# Altium PCB pd.PcbDoc
Units mil, origin at the board's own origin, x right, y up, seen from the top; angles counter-clockwise.
Board outline 3098.43 x 2220.47 mil, 4 copper layers (Top Layer, GND, VCC, Bottom Layer), stack 30.634 mil thick; 93 components, 43 nets, 276 pads, 52 vias.
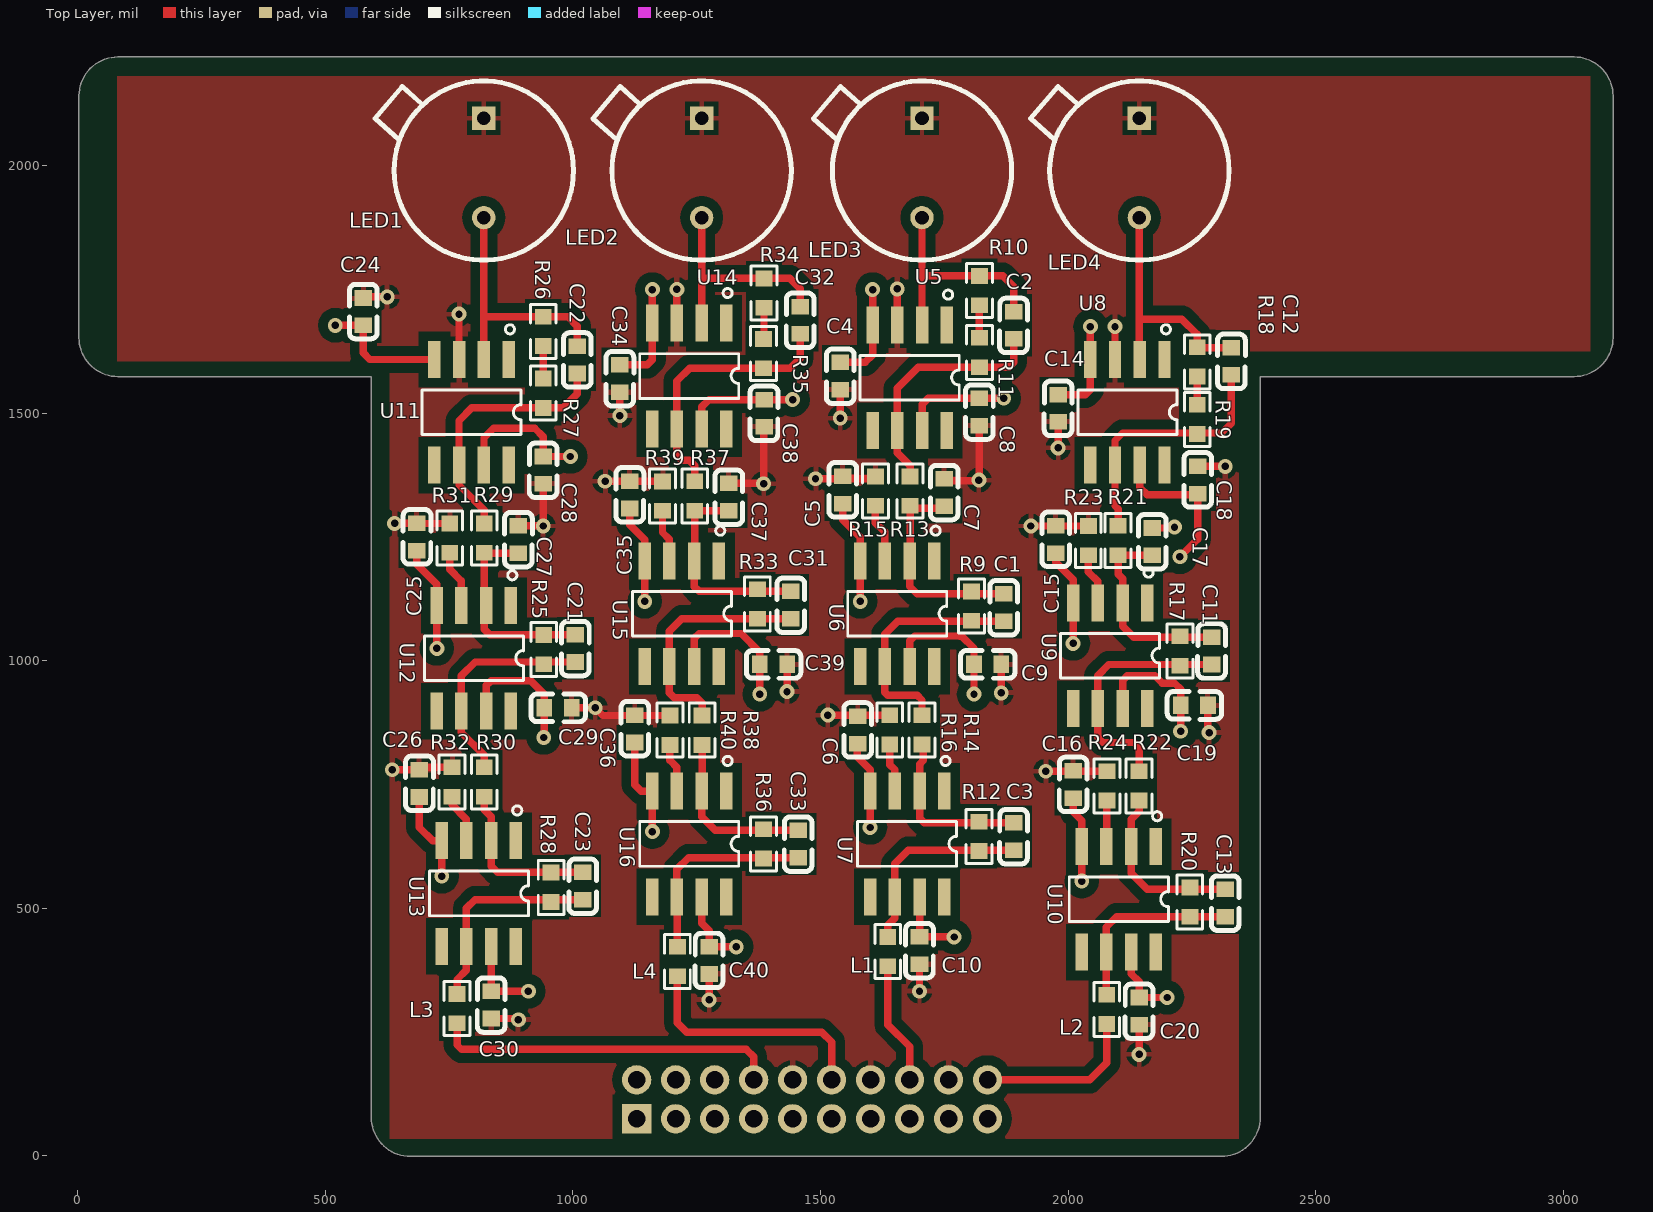
[diagram p0: Top Layer view]
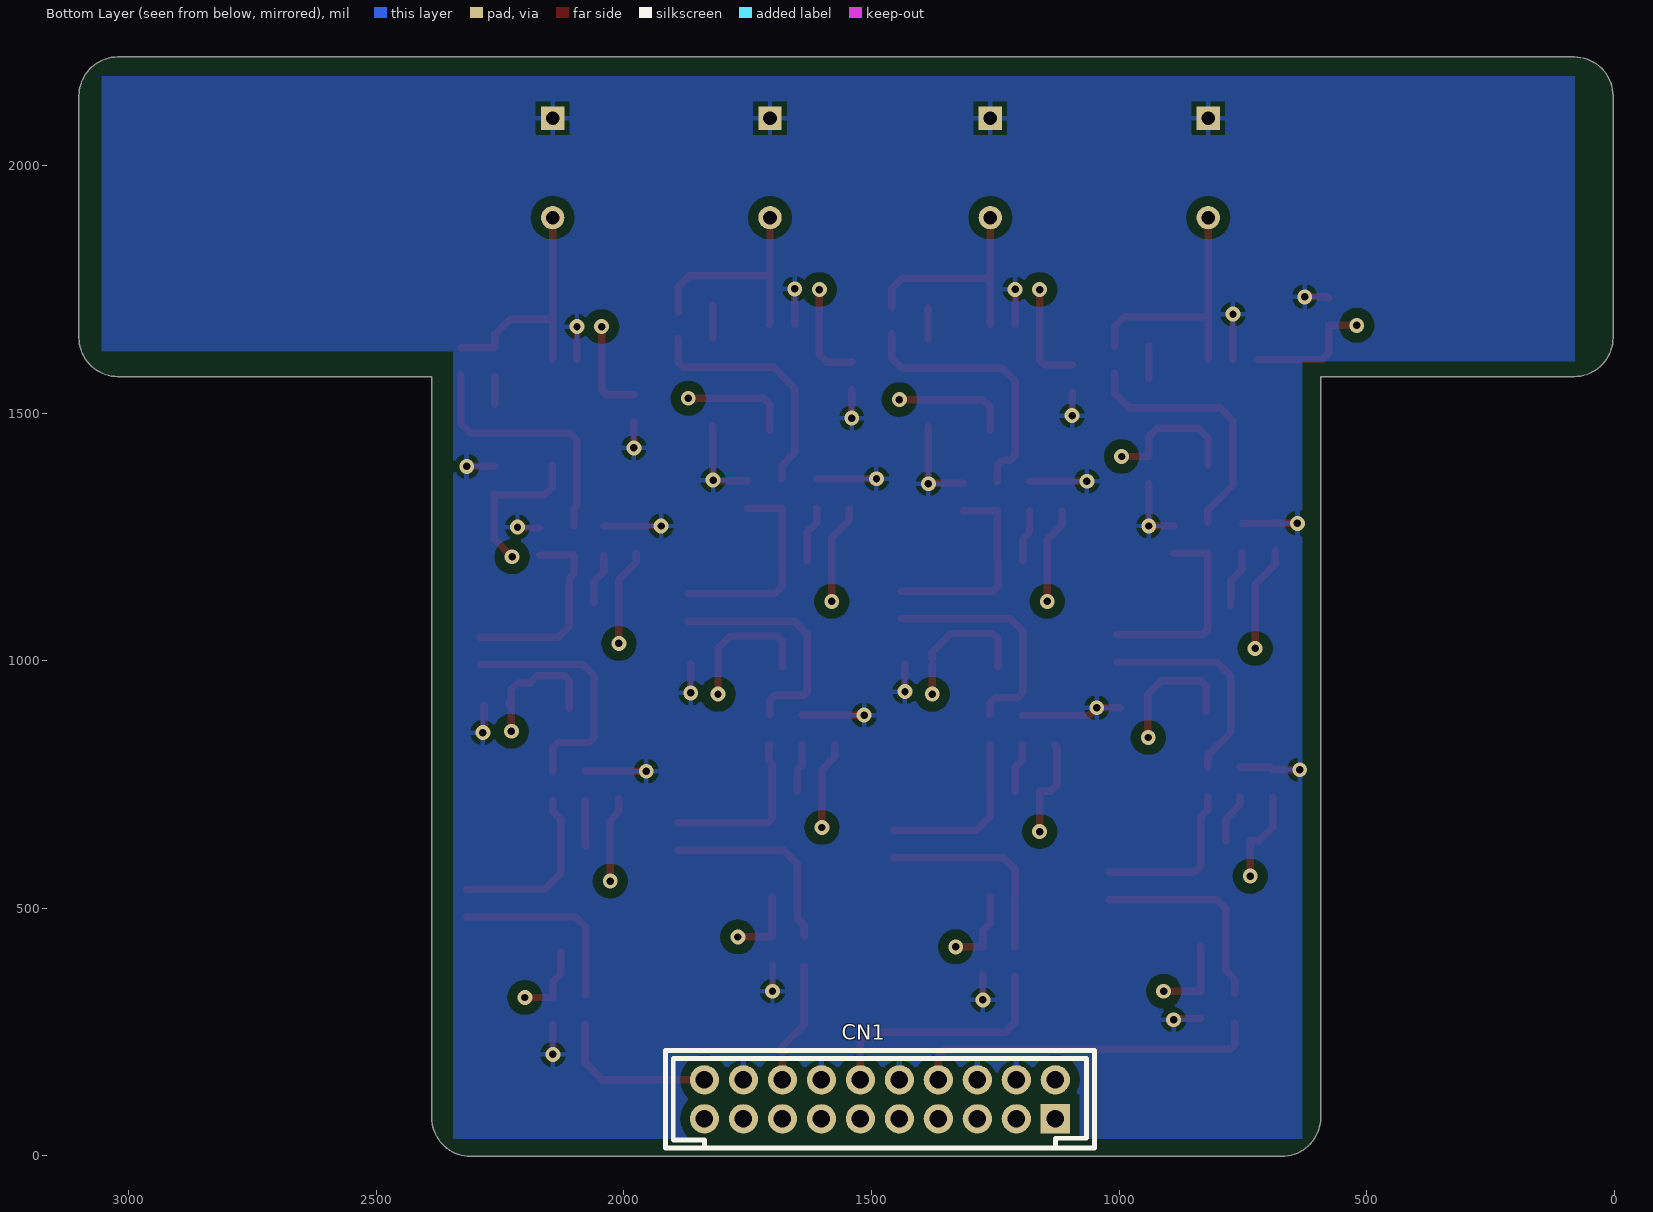
[diagram p1: Bottom Layer view, seen from below]
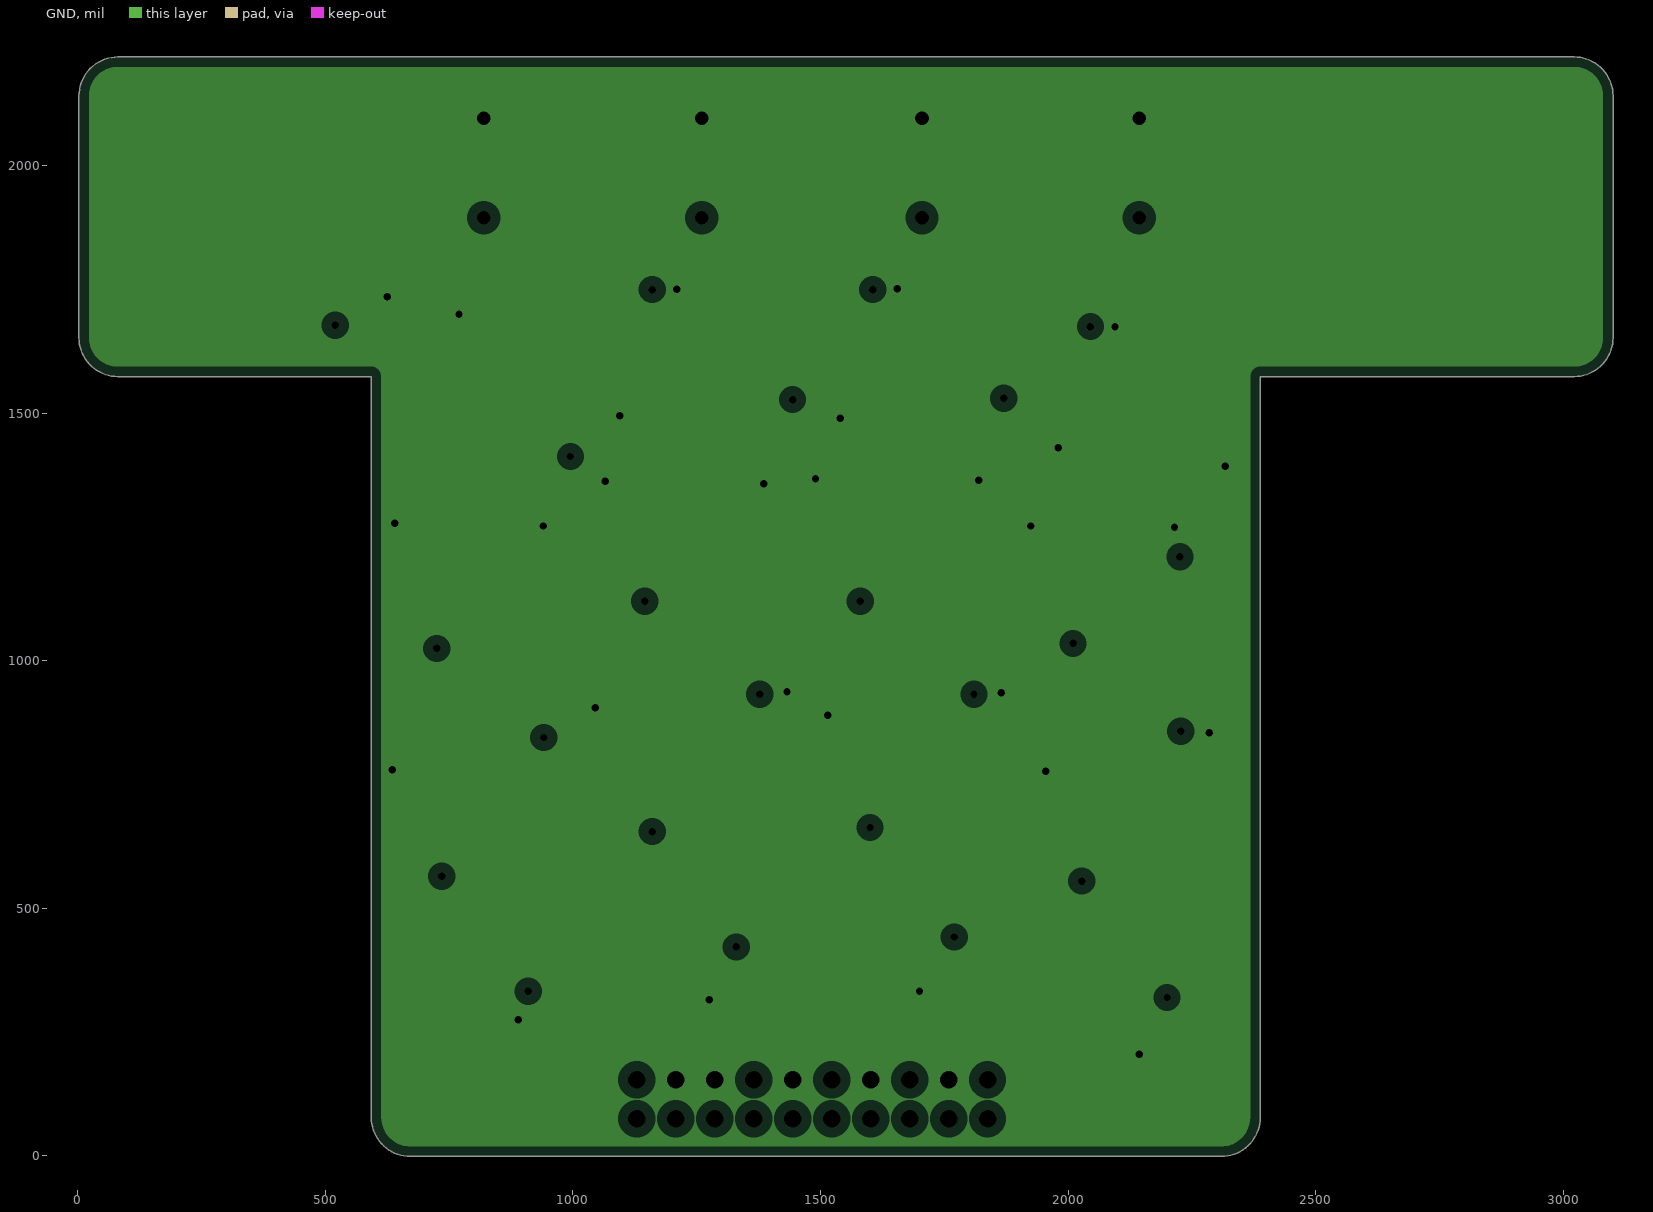
[diagram p2: GND, clearances drawn from the general rule]
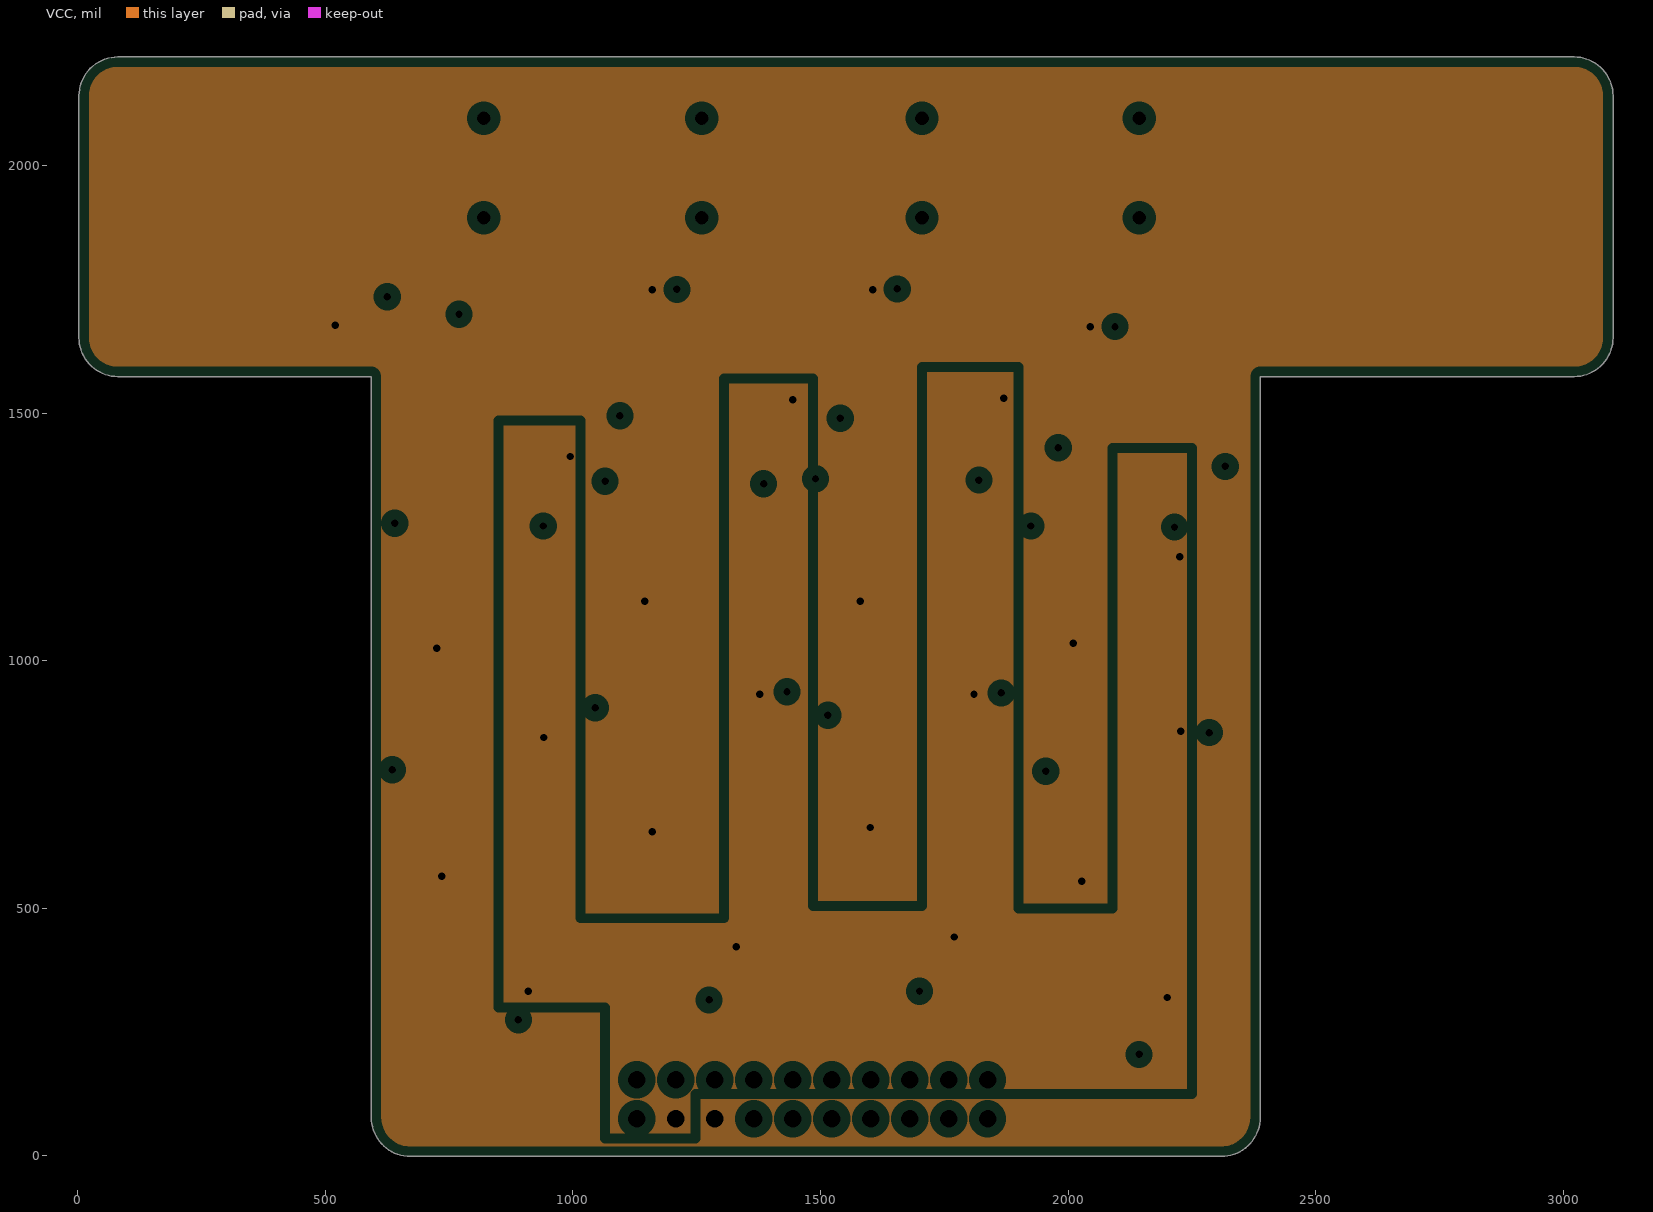
[diagram p3: VCC, clearances drawn from the general rule]

## Layer stack, top to bottom
Top Solder: solder mask 0.4, Solder Resist, Dk 3.5
Top Layer: signal copper 1.4
Dielectric 1: core 10, FR-4, Dk 4.2
GND: plane copper 1.417, net AGND
Dielectric 3: prepreg 5, Dk 4.2
VCC: plane copper 1.417, net (Multiple Nets)
Dielectric 2: core 10, Dk 4.2
Bottom Layer: signal copper 1.4
Bottom Solder: solder mask 0.4, Solder Resist, Dk 3.5

## Board outline
81.06,1573.87 592.87,1573.87 592.87,77.81 ccw(c671.61,77.81) 671.61,-0.93 2309.41,-0.93 ccw(c2309.41,77.81) 2388.15,77.81 2388.15,1573.87 3022.01,1573.87 ccw(c3022.01,1652.61) 3100.75,1652.61 3100.75,2140.8 ccw(c3022.01,2140.8) 3022.01,2219.54 81.06,2219.54 ccw(c81.06,2140.8) 2.32,2140.8 2.32,1652.61 ccw(c81.06,1652.61)

## Design rules (kind name [scope] priority, off if disabled: settings)
Clearance [All] p1: gap=20 ignorepadtopadclearanceinfootprint=FALSE except(6: Arc-Arc Arc-Track Arc-SMDPad Arc-THPad Arc-Via Arc-Text Arc-Hole Track-Track Track-SMDPad Track-THPad Track-Via Track-Text Track-Hole SMDPad-SMDPad SMDPad-THPad SMDPad-Via SMDPad-Text SMDPad-Hole THPad-THPad THPad-Via THPad-Text THPad-Hole Via-Via Via-Text Via-Hole Text-Text Text-Hole)
ComponentClearance [All] p1: gap=0 collisioncheckmode=3 verticalgap=0 showdistances=FALSE
PlaneClearance [All] p1: clearance=20
PlaneConnect [All] p1: planeconnectstyle=Relief reliefexpansion=20 reliefentries=4 reliefconductorwidth=10 reliefairgap=10
PolygonConnect [All] p1: connectstyle=Relief reliefconductorwidth=10 reliefentries=4 polygonreliefangle="90 Angle" airgapwidth=10
RoutingVias [All] p1: holewidth=15 width=30 viastyle="Through Hole" minholewidth=1 minwidth=1 maxholewidth=28 maxwidth=50
SilkToSilkClearance [All] p1: silktosilkclearance=0
SilkToSolderMaskClearance [IsPad] p1: minsilkscreentomaskgap=0 clearancetoexposedcopper=TRUE
SolderMaskExpansion [All] p1: expansion=4
Width [All] p1: maxlimit=100 minlimit=1 preferedwidth=15
25 further rules are at their usual default settings.

## Classes and differential pairs
component class pd: C21 C22 C23 C24 C25 C26 C27 C28 C29 C30 C31 C32 C33 C34 C35 C36 C37 C38 C39 C40 L3 L4 LED1 LED2 R25 R26 R27 R28 R29 R30 R31 R32 R33 R34 R35 R36 R37 R38 R39 R40 U11 U12 U13 U14 U15 U16
component class PD2: C1 C2 C3 C4 C5 C6 C7 C8 C9 C10 C11 C12 C13 C14 C15 C16 C17 C18 C19 C20 L1 L2 LED3 LED4 R9 R10 R11 R12 R13 R14 R15 R16 R17 R18 R19 R20 R21 R22 R23 R24 U5 U6 U7 U8 U9 U10
component class cnt: 1 2 3 4 CN1

## Components (designator, comment, footprint, x,y, rotation, side; value= is the part's Value field where it differs from the comment)
C1 "1000pF(NC)" 0603_C 1870,1102.44 r90 top
C2 "100P" 0603_C 1890,1672.56 r90 top
C3 "1000pF(NC)" 0603_C 1890,640 r90 top
C4 "0.1uF" 0603_C 1540,1570 r90 top
C5 "0.1uF" 0603_C 1545,1350 r270 top
C6 "0.1uF" 0603_C 1575,865 r270 top
C7 "0.01uF(NC)" 0603_C 1750,1335 r90 top
C8 "0.1uF" 0603_C 1820.99,1497.56 r90 top
C9 "0.1uF" 0603_C 1842.56,992.88 r180 top
C10 "0.1uF" 0603_C 1700,410 r90 top
C11 "1000pF(NC)" 0603_C 2290,1015 r90 top
C12 "100P" 0603_C 2330,1600 r90 top
C13 "1000pF(NC)" 0603_C 2317.44,505.86 r90 top
C14 "0.1uF" 0603_C 1980,1505 r90 top
C15 "0.1uF" 0603_C 1975,1250 r270 top
C16 "0.1uF" 0603_C 2010.2,755 r270 top
C17 "0.01uF(NC)" 0603_C 2170,1235.61 r90 top
C18 "0.1uF" 0603_C 2261.82,1370 r270 top
C19 "0.1uF" 0603_C 2260,910 r180 top
C20 "0.1uF" 0603_C 2143.44,287.44 r90 top
C21 "1000pF(NC)" 0603_C 1005,1020 r90 top
C22 "100P" 0603_C 1009.01,1602.81 r90 top
C23 "1000pF(NC)" 0603_C 1020,540 r90 top
C24 "0.1uF" 0603_C 576.62,1710 r270 top
C25 "0.1uF" 0603_C 685,1255 r270 top
C26 "0.1uF" 0603_C 690,757.44 r270 top
C27 "0.01uF(NC)" 0603_C 890,1240 r90 top
C28 "0.1uF" 0603_C 940,1380 r90 top
C29 "0.1uF" 0603_C 975,905 r180 top
C30 "0.1uF" 0603_C 835,300 r90 top
C31 "1000pF(NC)" 0603_C 1440,1107.44 r90 top
C32 "100P" 0603_C 1459.01,1682.81 r90 top
C33 "1000pF(NC)" 0603_C 1455,625 r90 top
C34 "0.1uF" 0603_C 1095,1565 r90 top
C35 "0.1uF" 0603_C 1115,1340 r270 top
C36 "0.1uF" 0603_C 1125,867.56 r270 top
C37 "0.01uF(NC)" 0603_C 1315,1325.61 r90 top
C38 "0.1uF" 0603_C 1385.99,1495 r90 top
C39 "0.1uF" 0603_C 1410,992.88 r180 top
C40 "0.1uF" 0603_C 1275,390 r90 top
CN1 "HC-PHD-2*10A" HC-PHD-2*10A 1481.18,115.95 r180 bottom
L1 "100R" R0603 1635,415 r90 top
L2 "100R" R0603 2077.25,298.31 r90 top
L3 "100R" R0603 765,300 r90 top
L4 "100R" R0603 1210,395 r90 top
LED1 "LTST-C191TGKT" PD 820,1895 r90 top locked
LED2 "LTST-C191TGKT" PD 1260,1895 r90 top locked
LED3 "LTST-C191TGKT" PD 1705,1895 r90 top locked
LED4 "LTST-C191TGKT" PD 2144.05,1895 r90 top locked
R9 "6.8K" 0603_R 1789.01,1102.81 r90 top
R10 "500M" 0603_R 1805,1740 r90 top
R11 "0" 0603_R 1805,1615 r90 top
R12 "6.8K" 0603_R 1804.01,637.81 r90 top
R13 "1K" 0603_R 1665,1335 r90 top
R14 "1K" 0603_R 1689.01,852.81 r90 top
R15 "1K" 0603_R 1595,1335 r90 top
R16 "1K" 0603_R 1624.01,852.81 r90 top
R17 "6.8K" 0603_R 2210,1012.31 r90 top
R18 "500M" 0603_R 2245,1596.19 r90 top
R19 "0" 0603_R 2245,1480 r90 top
R20 "6.8K" 0603_R 2230,505 r90 top
R21 "1K" 0603_R 2085,1235.27 r90 top
R22 "1K" 0603_R 2127.44,739.74 r90 top
R23 "1K" 0603_R 2025,1235 r90 top
R24 "1K" 0603_R 2062.44,739.74 r90 top
R25 "6.8K" 0603_R 925,1015 r90 top
R26 "500M" 0603_R 924.01,1657.81 r90 top
R27 "0" 0603_R 924.01,1532.81 r90 top
R28 "6.8K" 0603_R 940,535 r90 top
R29 "1K" 0603_R 805,1240 r90 top
R30 "1K" 0603_R 805,747.72 r90 top
R31 "1K" 0603_R 735.2,1240 r90 top
R32 "1K" 0603_R 740,747.72 r90 top
R33 "6.8K" 0603_R 1356.53,1107.11 r90 top
R34 "500M" 0603_R 1370,1735 r90 top
R35 "0" 0603_R 1369.01,1612.81 r90 top
R36 "6.8K" 0603_R 1369.01,622.81 r90 top
R37 "1K" 0603_R 1230,1325.27 r90 top
R38 "1K" 0603_R 1245,852.22 r90 top
R39 "1K" 0603_R 1165,1325 r90 top
R40 "1K" 0603_R 1180,852.22 r90 top
U5 "LTC6240" TSOT-23-5 1690.2,1576.69 r270 top
U6 "OP07/SO" TSOT-23-5 1665,1100 r270 top
U7 "OP07/SO" TSOT-23-5 1685,635 r270 top
U8 "LTC6240" TSOT-23-5 2130,1506.69 r270 top
U9 "OP07/SO" TSOT-23-5 2095,1015.2 r270 top
U10 "OP07/SO" TSOT-23-5 2112.44,523.31 r270 top
U11 "LTC6240" TSOT-23-5 805.2,1506.69 r270 top
U12 "OP07/SO" TSOT-23-5 810,1010 r270 top
U13 "OP07/SO" TSOT-23-5 820,535 r270 top
U14 "LTC6240" TSOT-23-5 1245,1580 r270 top
U15 "OP07/SO" TSOT-23-5 1230,1100 r270 top
U16 "OP07/SO" TSOT-23-5 1245,635 r270 top

## Footprints (in the part's own frame and the unit in brackets; to place one, negate y for a bottom-side part, rotate by r counter-clockwise, add the part's x,y. Pads: shape width x height; smd on the part's side, far side on the other; paste and mask are expansions set on the pad)
0603_C [mm]
  rect 0.8x0.9 smd: 1(-0.573,0) 2(0.827,0)
  silkscreen extent -1.28,-0.71 1.52,0.72
0603_R [mil]
  rect 31.75x34.02 smd: 1(-22.12,-15.99) 2(37.19,-15.99)
  silkscreen extent -47,-42 62,10
HC-PHD-2*10A [mm]
  rect 1.5x1.5 hole 0.9: 1(8.951,-1.04)
  round 1.5 hole 0.9: 2(8.951,0.96) 3(6.951,-1.04) 4(6.951,0.96) 5(4.951,-1.04) 6(4.951,0.96) 7(2.951,-1.04) 8(2.951,0.96) 9(0.951,-1.04) 10(0.951,0.96) 11(-1.049,-1.04) 12(-1.049,0.96) 13(-3.049,-1.04) 14(-3.049,0.96) 15(-5.049,-1.04) 16(-5.049,0.96) 17(-7.049,-1.04) 18(-7.049,0.96) 19(-9.049,-1.04) 20(-9.049,0.96)
  silkscreen extent -11.05,-2.54 10.95,2.46
PD [mm]
  rect 1.2x1.2 hole 0.7: 1(5.1,0)
  round 1.2 hole 0.7: 2(0,0)
  silkscreen extent -2.18,-4.6 7.01,5.58
R0603 [mil]
  rect 31.75x34.02 smd: 1(-32.12,-0.99) 2(27.19,-0.99)
  silkscreen extent -57,-27 52,25
TSOT-23-5 [mil]
  rect 74.8x25.2 smd: 1(-101.69,64.8) 2(-101.69,15.2) 3(-101.69,-35.2) 4(-101.69,-84.8) 5(111.69,-84.8) 6(111.69,-35.2) 7(111.69,15.2) 8(111.69,64.8)
  silkscreen extent -172,-110 50,90

## Part data
C1 C2 C3 C4 C5 C6 C7 C8 C9 C10 C11 C12 C13 C14 C15 C16 C17 C18 C19 C20 C21 C22 C23 C24 C25 C26 C27 C28 C29 C30 C31 C32 C33 C34 C35 C36 C37 C38 C39 C40: library part "CAP NP 0805"
CN1: BOM_Manufacturer=HCTL(华灿天, BOM_Manufacturer Part=HC-PHD-2*10A, BOM_Supplier=LCSC, BOM_Supplier Part=C2845621, Contributor=LCSC, spicePre=C, spiceSymbolName=HC-PHD-2*10A
L1 L2 L3 L4 R9 R10 R11 R12 R13 R14 R15 R16 R17 R18 R19 R20 R21 R22 R23 R24 R25 R26 R27 R28 R29 R30 R31 R32 R33 R34 R35 R36 R37 R38 R39 R40: library part "RES 0805"
LED1 LED2 LED3 LED4: BOM_Manufacturer=LITEON, BOM_Manufacturer Part=LTST-C191TGKT, BOM_Supplier=LCSC, BOM_Supplier Part=C125101, Contributor=LCSC, spicePre=L, spiceSymbolName=LTST-C191TGKT
U5 U6 U7 U8 U9 U10 U11 U12 U13 U14 U15 U16: library part OP07/SO_1

## Via types
v1: diameter 30, hole 15, Top Layer to Bottom Layer, 52 vias

## Nets (pads, with @x,y where several pads share a name; then routed paths per layer and width w, separated by ;. In a path a pad name is that pad's centre, name@x,y a point inside that pad or via, vN(x,y) a via of type N, cw(c..) or ccw(c..) an arc to the next point about the centre after c; other vN are vias at no path point)
A+5V: C8.2 C9.2 C10.2 C18.2 C19.2 C20.2 C28.2 C29.2 C30.2 C38.2 C39.2 C40.2 CN1.3 U5.7 U6.7 U7.7 U8.7 U9.7 U10.7 U11.7 U12.7 U13.7 U14.7 U15.7 U16.7 | length 2814.7
  Top Layer w15: U11.7 820.4,1450.4 840,1470 922.52,1470 940,1452.52 C28.2 v1(995,1412.56) ; U12.7 825.2,950.2 835,960 915,960 942.44,932.56 C29.2 942.44,846.45 v1(940.99,845) ; C30.2 C30.2@840,332.56 ; U13.7 835.2,337.35 C30.2@840,332.56 ; v1(910,332.56) C30.2@840,332.56 ; U15.7 1245.2,1045.2 1255,1055 1340,1055 1377.44,1017.56 C39.2@1377.44,1005 ; U16.7 1260.2,469.8 1275,455 C40.2 1329.63,422.56 v1(1330,422.19) ; U14.7@1260.4,1465 1260.4,1512.95 1275,1527.56 C38.2 v1(1443.74,1527.56) ; v1(1377.44,932.56) C39.2 ; U6.7 1680.2,1040.2 1690,1050 1780.89,1050 1781.57,1049.31 1785.69,1049.31 1810,1025 C9.2 v1(1810,932.56) ; U7.7 1700.2,442.76 C10.2 1769.63,442.56 v1(1770,442.19) ; U5.7 1705.4,1517.95 1717.56,1530.11 C8.2 v1(1870,1530.11) ; U9.7 2110.2,960.2 2119.44,969.44 2175.56,969.44 2190,955 2215,955 2227.44,942.56 C19.2@2227.44,917.35 ; U10.7 2127.65,367.35 2143.44,351.56 C20.2 v1(2200,320) ; U8.7 2145.2,1349.8 2160,1335 2259.37,1335 C18.2 2261.82,1245.82 v1(2225.99,1210) ; v1(2227.44,857.56) C19.2 C19.2@2227.44,917.35 ; C19.2@2232.44,915 2229.8,915 C19.2@2227.44,917.35
A-5V: C4.2 C5.2 C6.2 C14.2 C15.2 C16.2 C24.2 C25.2 C26.2 C34.2 C35.2 C36.2 CN1.5 U5.4 U6.4 U7.4 U8.4 U9.4 U10.4 U11.4 U12.4 U13.4 U14.4 U15.4 U16.4 | length 2427
  Top Layer w15: v1(520,1677.44) C24.2 576.62,1621.76 590,1608.38 U11.4 ; C25.2 685,1195 725.2,1154.8 U12.4 v1(725.2,1025) ; C26.2 690,663.31 716.62,636.69 U13.4 v1(735.2,565) ; C34.2 1150,1597.56 1160.4,1607.95 1160.4,1678.38 v1(1160.4,1749.6) ; C35.2@1115,1302.44 1115,1275 1145.2,1244.8 U15.4 1145.2,1120.2 v1(1145,1120) ; C36.2@1130,829.39 1125,824.39 1125,750 1138.31,736.69 U16.4 1160.2,655.2 v1(1160.4,655) ; C4.2 1590,1602.56 1605.4,1617.95 U5.4 v1(1605.4,1749.6) ; C5.2@1545,1307.44 1545,1285 1580.2,1249.8 U6.4 v1(1580.2,1120) ; C6.2@1574.01,829.99 1574.01,805.99 1600.2,779.8 U7.4 v1(1600.2,663.31) ; C15.2 1975,1199.21 2010.2,1164.01 U9.4 v1(2010.2,1035) ; C14.2 2035.11,1537.56 2045.2,1547.65 U8.4 v1(2045.2,1675) ; C16.2 2010.2,694.8 2027.65,677.35 U10.4 v1(2027.65,555)
AGND: C4.1 C5.1 C6.1 C7.2 C8.1 C9.1 C10.1 C14.1 C15.1 C16.1 C17.2 C18.1 C19.1 C20.1 C24.1 C25.1 C26.1 C27.2 C28.1 C29.1 C30.1 C34.1 C35.1 C36.1 C37.2 C38.1 C39.1 C40.1 CN1.4 CN1.6 CN1.10 CN1.14 CN1.18 LED1.1 LED2.1 LED3.1 LED4.1 R15.2 R16.2 R23.2 R24.2 R31.2 R32.2 R39.2 R40.2 U5.3 U8.3 U11.3 U14.3 | length 2550.4
  Top Layer w15: C24.1 579.06,1735 v1(625,1735) ; v1(635,780) C26.1 694.9,784.9 R32.2 ; v1(640,1277.56) C25.1 685.37,1277.19 R31.2 ; U11.3 v1(770,1700) ; C30.1 887.56,277.44 v1(890,275) ; C27.2 939.63,1272.56 v1(940,1272.19) C28.1 ; C29.1 v1(1045,905) 1060.6,889.4 R40.2 ; v1(1065,1362.46) 1065.27,1362.19 R39.2 ; v1(1095,1495) C34.1 ; U14.3@1210,1678.38 v1@1210,1754.01 ; v1(1275,315) C40.1 ; C37.2 1384.28,1358.16 v1(1385,1357.44) 1385,1471.45 C38.1 ; v1(1432.44,937.65) 1432.56,937.65 C39.1 ; v1(1490,1367.56) 1545,1367.56 1545.37,1367.19 R15.2@1610.99,1367.19 ; v1(1515,890.11) 1522.48,890.11 1522.59,890 R16.2 ; v1(1540,1490) C4.1 ; U5.3 v1(1655,1750.99) ; v1(1700,332.56) C10.1 ; C7.2@1750,1363.16 1818.16,1363.16 v1(1820,1365) 1820.99,1365.99 C8.1 ; v1(1865,935) 1865.11,935.11 C9.1 ; v1(1925,1272.19) R23.2 ; v1(1955,776.92) R24.2 ; v1(1980,1430) C14.1 ; U8.3 v1(2094.8,1675) ; v1(2143.44,205) C20.1 ; C17.2 2213.17,1268.16 v1(2215,1270) ; C18.1 v1(2317.44,1392.56) ; C19.1 2282.56,857.44 v1(2285,855)
  other v1: 1210,1750
Linght_AD1: CN1.8 L3.1 | length 699.1
  Top Layer w15: L3.1 765.99,224.01 775,215 1350,215 1365,200 CN1.8
Linght_AD2: CN1.12 L4.1 | length 497.8
  Top Layer w15: L4.1 1210.99,269.01 1230,250 1502.48,250 1522.48,230 CN1.12
Linght_AD3: CN1.16 L1.1 | length 247.3
  Top Layer w15: L1.1 1635.99,264.89 1679.96,220.92 CN1.16
Linght_AD4: CN1.20 L2.1 | length 333
  Top Layer w15: CN1.20 2043.74,153.74 2078.24,188.24 L2.1
NetC1_1: C1.1 R9.1 R14.2 U6.6 | length 481
  Top Layer w15: R14.2 1705,920.78 1695.78,930 1635.99,930 1629.8,936.19 U6.6 1629.8,1053.81 1655.88,1079.89 C1.1
NetC1_2: C1.2 C7.1 R9.2 R13.1 U6.2 | length 423.6
  Top Layer w15: C7.1@1750,1308.06 1681.17,1308.06 1680.99,1307.88 1680.99,1202.48 U6.2 1679.96,1201.45 1679.96,1150 1694.96,1135 C1.2
NetC2_1: C2.1 R11.1 R13.2 U5.6 | length 497.9
  Top Layer w15: R13.2@1680.99,1367.19 1680.99,1394.01 1655,1420 U5.6 1655,1550.26 1697.62,1592.88 R11.1 1880.32,1592.88 1890,1602.56 C2.1
NetC2_2: C2.2 LED3.2 R10.2 U5.2 | length 462
  Top Layer w15: LED3.2 1705,1780 ; U5.2 1705,1678.78 1705,1780 ; C2.2 1890,1755 1867.81,1777.19 R10.2 1707.81,1777.19 1705,1780
NetC3_1: C3.1 L1.2 R12.1 U7.6 | length 405
  Top Layer w15: L1.2 1635.99,465.99 1649.8,479.8 U7.6 1649.8,589.8 1677.44,617.44 C3.1
NetC3_2: C3.2 R12.2 R14.1 U7.2 | length 346.6
  Top Layer w15: R14.1 1707.81,827.88 1707.81,799.01 1700.2,791.39 U7.2 1700.2,682.22 1709.86,672.56 C3.2
NetC11_1: C11.1 R17.1 R22.2 U9.6 | length 504.4
  Top Layer w15: R22.2 2143.44,825 2133.44,835 2070,835 2059.8,845.2 U9.6 2059.8,970 2082.25,992.44 C11.1
NetC11_2: C11.2 C17.1 R17.2 R21.1 U9.2 | length 405.2
  Top Layer w15: C17.1 2101.09,1213.06 R21.1 2100.99,1175 2110.2,1165.79 U9.2 2110.2,1069.8 2132.44,1047.56 C11.2
NetC12_1: C12.1 R19.1 R21.2 U8.6 | length 522.1
  Top Layer w15: R21.2 2100.99,1306.45 2094.8,1312.65 U8.6 2094.8,1444.8 2110,1460 2310,1460 2330,1480 C12.1
NetC12_2: C12.2 LED4.2 R18.2 U8.2 | length 511.8
  Top Layer w15: LED4.2 2144.05,1690 ; U8.2 2144.05,1609.53 2144.05,1690 ; C12.2 2261.82,1632.56 R18.2 2260.99,1659.01 2230,1690 2144.05,1690
NetC13_1: C13.1 L2.2 R20.1 U10.6 | length 386.1
  Top Layer w15: L2.2 2077.25,326.49 U10.6 2077.25,462.24 2098.31,483.31 C13.1
NetC13_2: C13.2 R20.2 R22.1 U10.2 | length 356.6
  Top Layer w15: R22.1 2143.44,695.79 2127.65,680 U10.2 2127.65,570.79 2160.02,538.42 C13.2
NetC21_1: C21.1 R25.1 R30.2 U12.6 | length 445.7
  Top Layer w15: R30.2 820.99,809.01 774.8,855.2 U12.6 774.8,969.8 802.44,997.44 C21.1
NetC21_2: C21.2 C27.1 R25.2 R29.1 U12.2 | length 411.8
  Top Layer w15: C27.1 821.42,1217.44 R29.1 820.99,1064.01 832.44,1052.56 C21.2
NetC22_1: C22.1 R27.1 R29.2 U11.6 | length 528.8
  Top Layer w15: R29.2@820.99,1280 820.99,1304.01 770,1355 U11.6 770,1485 795.69,1510.69 R27.1 980.69,1510.69 1009.01,1539.01 C22.1
NetC22_2: C22.2 LED1.2 R26.2 U11.2 | length 524.3
  Top Layer w15: LED1.2 820,1695 ; U11.2 820,1608.78 820,1695 ; C22.2 1009.01,1675.99 990,1695 R26.2 820,1695
NetC23_1: C23.1 L3.2 R28.1 U13.6 | length 423
  Top Layer w15: L3.2 765.99,356.19 784.8,375 U13.6 784.8,500 802.24,517.44 C23.1
NetC23_2: C23.2 R28.2 R30.1 U13.2 | length 336.4
  Top Layer w15: R30.1 820.99,699.21 835.2,685 U13.2 835.2,585 847.65,572.56 C23.2
NetC31_1: C31.1 R33.1 R38.2 U15.6 | length 479.9
  Top Layer w15: R38.2 1260.99,914.01 1250,925 1205,925 1194.8,935.2 U15.6 1194.8,1060 1219.69,1084.89 C31.1
NetC31_2: C31.2 C37.1 R33.2 R37.1 U15.2 | length 421.6
  Top Layer w15: C37.1 1246.09,1303.06 R37.1 1245.99,1202.48 U15.2 1245.2,1149.8 1255,1140 C31.2
NetC32_1: C32.1 R35.1 R37.2 U14.6 | length 543.4
  Top Layer w15: R37.2 1245.99,1394.01 1235,1405 1220,1405 1210,1415 1210,1465 1210,1565 1235.69,1590.69 R35.1 1438.5,1590.69 1459.01,1611.19 C32.1
NetC32_2: C32.2 LED2.2 R34.2 U14.2 | length 461.1
  Top Layer w15: LED2.2 1260,1770 ; U14.2@1260.4,1678.38 1260,1678.78 1260,1770 ; C32.2 1459.01,1750.99 1437.81,1772.19 R34.2 1262.19,1772.19 1260,1770
NetC33_1: C33.1 L4.2 R36.1 U16.6 | length 412.1
  Top Layer w15: L4.2 1210.99,522.12 U16.6 1209.8,578.81 1233.44,602.44 C33.1
NetC33_2: C33.2 R36.2 R38.1 U16.2 | length 351.7
  Top Layer w15: R38.1 1260.99,737.48 U16.2 1260.2,684.8 1287.44,657.56 C33.2
NetR10_1: R10.1 R11.2 | length 65.7
  Top Layer w15: R11.2 R10.1
NetR15_1: R15.1 U6.3 | length 114
  Top Layer w15: R15.1@1610.99,1307.88 1610.99,1279.01 1629.8,1260.2 U6.3
NetR16_1: R16.1 U7.3 | length 98.1
  Top Layer w15: R16.1 1640,790.2 1649.8,780.4 U7.3
NetR18_1: R18.1 R19.2 | length 56.9
  Top Layer w15: R19.2 R18.1
NetR23_1: R23.1 U9.3 | length 103.8
  Top Layer w15: R23.1 2040.99,1179.21 2059.8,1160.4 U9.3
NetR24_1: R24.1 U10.3 | length 93.1
  Top Layer w15: U10.3 2078.44,626.19 R24.1
NetR26_1: R26.1 R27.2 | length 65.7
  Top Layer w15: R27.2 R26.1
NetR31_1: R31.1 U12.3 | length 116
  Top Layer w15: R31.1 751.19,1184.8 774.8,1161.19 U12.3
NetR32_1: R32.1 U13.3 | length 100.8
  Top Layer w15: R32.1 755.99,709.01 784.8,680.2 U13.3
NetR34_1: R34.1 R35.2 | length 63.3
  Top Layer w15: R35.2 1385.99,1650.99 R34.1
NetR39_1: R39.1 U15.3 | length 106.9
  Top Layer w15: R39.1 1180.99,1259.01 1194.8,1245.2 U15.3
NetR40_1: R40.1 U16.3 | length 99.1
  Top Layer w15: R40.1 1195.99,799.01 1209.8,785.2 U16.3
pads on no net: CN1.1 CN1.2 CN1.7 CN1.9 CN1.11 CN1.13 CN1.15 CN1.17 CN1.19 U5.1 U5.5 U5.8 U6.1 U6.5 U6.8 U7.1 U7.5 U7.8 U8.1 U8.5 U8.8 U9.1 U9.5 U9.8 U10.1 U10.5 U10.8 U11.1 U11.5 U11.8 U12.1 U12.5 U12.8 U13.1 U13.5 U13.8 U14.1 U14.5 U14.8 U15.1 U15.5 U15.8 U16.1 U16.5 U16.8

## Polygon pours and split planes (outlines as drawn)
AGND on Top Layer "Top Layer-AGND" (solid, remove dead copper, pour order 0): 80,2180 3055,2180 3055,1625 2345,1625 2345,35 630,35 630,1605 80,1605
AGND on Bottom Layer "Bottom Layer-AGND" (solid, remove dead copper, pour order 2): 80,2180 3055,2180 3055,1625 2345,1625 2345,35 630,35 630,1605 80,1605
AGND on GND (split plane): 3028.58,2199.16 3035.08,2198.06 3041.4,2196.24 3047.49,2193.72 3053.25,2190.53 3058.63,2186.72 3063.54,2182.33 3067.93,2177.42 3071.74,2172.05 3074.92,2166.28 3077.44,2160.2 3079.27,2153.87 3080.37,2147.38 3080.71,2141.38 3080.65,2140.8 3080.65,1652.61 3080.71,1652.04 3080.37,1646.04 3079.27,1639.54 3077.44,1633.21 3074.92,1627.13 3071.74,1621.37 3067.93,1615.99 3063.54,1611.08 3058.63,1606.69 3053.25,1602.88 3047.49,1599.7 3041.4,1597.18 3035.08,1595.35 3028.58,1594.25 3022.58,1593.91 3022.01,1593.97 2388.15,1593.97 2384.23,1593.58 2380.46,1592.44 2376.98,1590.58 2373.94,1588.08 2371.44,1585.04 2369.58,1581.56 2368.44,1577.79 2368.05,1573.87 2368.05,77.81 2368.11,77.23 2367.77,71.23 2366.67,64.74 2364.84,58.41 2362.32,52.33 2359.14,46.56 2355.33,41.19 2350.94,36.28 2346.03,31.89 2340.66,28.08 2334.89,24.89 2328.81,22.37 2322.48,20.55 2315.98,19.45 2309.99,19.11 2309.41,19.17 671.61,19.17 671.04,19.11 665.04,19.45 658.54,20.55 652.21,22.37 646.13,24.89 640.37,28.08 634.99,31.89 630.08,36.28 625.69,41.19 621.88,46.56 618.7,52.33 616.18,58.41 614.35,64.74 613.25,71.23 612.91,77.23 612.97,77.81 612.97,1573.87 612.58,1577.79 611.44,1581.56 609.58,1585.04 607.08,1588.08 604.04,1590.58 600.56,1592.44 596.79,1593.58 592.87,1593.97 81.06,1593.97 80.48,1593.91 74.49,1594.25 67.99,1595.35 61.66,1597.18 55.58,1599.7 49.81,1602.88 44.44,1606.69 39.53,1611.08 35.14,1615.99 31.33,1621.37 28.15,1627.13 25.63,1633.21 23.8,1639.54 22.7,1646.04 22.36,1652.04 22.42,1652.61 22.42,2140.8 22.36,2141.38 22.7,2147.38 23.8,2153.87 25.63,2160.2 28.15,2166.28 31.33,2172.05 35.14,2177.42 39.53,2182.33 44.44,2186.72 49.81,2190.53 55.58,2193.72 61.66,2196.24 67.99,2198.06 74.49,2199.16 80.48,2199.5 81.06,2199.44 3022.01,2199.44 3022.58,2199.5
A-5V on VCC (split plane): 3028.58,2199.16 3035.08,2198.06 3041.4,2196.24 3047.49,2193.72 3053.25,2190.53 3058.63,2186.72 3063.54,2182.33 3067.93,2177.42 3071.74,2172.05 3074.92,2166.28 3077.44,2160.2 3079.27,2153.87 3080.37,2147.38 3080.71,2141.38 3080.65,2140.8 3080.65,1652.61 3080.71,1652.04 3080.37,1646.04 3079.27,1639.54 3077.44,1633.21 3074.92,1627.13 3071.74,1621.37 3067.93,1615.99 3063.54,1611.08 3058.63,1606.69 3053.25,1602.88 3047.49,1599.7 3041.4,1597.18 3035.08,1595.35 3028.58,1594.25 3022.58,1593.91 3022.01,1593.97 2388.15,1593.97 2384.23,1593.58 2380.46,1592.44 2376.98,1590.58 2373.94,1588.08 2371.44,1585.04 2369.58,1581.56 2368.44,1577.79 2368.05,1573.87 2368.05,77.81 2368.11,77.23 2367.77,71.23 2366.67,64.74 2364.84,58.41 2362.32,52.33 2359.14,46.56 2355.33,41.19 2350.94,36.28 2346.03,31.89 2340.66,28.08 2334.89,24.89 2328.81,22.37 2322.48,20.55 2315.98,19.45 2309.99,19.11 2309.41,19.17 671.61,19.17 671.04,19.11 665.04,19.45 658.54,20.55 652.21,22.37 646.13,24.89 640.37,28.08 634.99,31.89 630.08,36.28 625.69,41.19 621.88,46.56 618.7,52.33 616.18,58.41 614.35,64.74 613.25,71.23 612.91,77.23 612.97,77.81 612.97,1573.87 612.58,1577.79 611.44,1581.56 609.58,1585.04 607.08,1588.08 604.04,1590.58 600.56,1592.44 596.79,1593.58 592.87,1593.97 81.06,1593.97 80.48,1593.91 74.49,1594.25 67.99,1595.35 61.66,1597.18 55.58,1599.7 49.81,1602.88 44.44,1606.69 39.53,1611.08 35.14,1615.99 31.33,1621.37 28.15,1627.13 25.63,1633.21 23.8,1639.54 22.7,1646.04 22.36,1652.04 22.42,1652.61 22.42,2140.8 22.36,2141.38 22.7,2147.38 23.8,2153.87 25.63,2160.2 28.15,2166.28 31.33,2172.05 35.14,2177.42 39.53,2182.33 44.44,2186.72 49.81,2190.53 55.58,2193.72 61.66,2196.24 67.99,2198.06 74.49,2199.16 80.48,2199.5 81.06,2199.44 3022.01,2199.44 3022.58,2199.5
A+5V on VCC (split plane): 1889.91,500 1890.26,497.39 1891.26,494.96 1892.87,492.87 1894.96,491.27 1897.39,490.26 1900,489.91 2090,489.91 2092.61,490.26 2095.04,491.27 2097.13,492.87 2098.74,494.96 2099.74,497.39 2100.09,500 2100.09,1419.91 2239.91,1419.91 2239.91,135.09 1247.61,135.09 1245,134.74 1242.57,133.73 1240.48,132.13 1238.88,130.04 1237.87,127.61 1237.52,125 1237.52,45.09 1075.09,45.09 1075.09,300 1074.74,302.61 1073.73,305.04 1072.13,307.13 1070.04,308.73 1067.61,309.74 1065,310.09 860.09,310.09 860.09,1474.91 1004.91,1474.91 1004.91,480 1005.26,477.39 1006.27,474.96 1007.87,472.87 1009.96,471.27 1012.39,470.26 1015,469.91 1305,469.91 1307.61,470.26 1310.04,471.27 1312.13,472.87 1313.73,474.96 1314.74,477.39 1315.09,480 1315.09,1559.91 1474.91,1559.91 1474.91,505 1475.26,502.39 1476.27,499.96 1477.87,497.87 1479.96,496.27 1482.39,495.26 1485,494.91 1705,494.91 1707.61,495.26 1710.04,496.27 1712.13,497.87 1713.73,499.96 1714.74,502.39 1715.09,505 1715.09,1583.5 1889.91,1583.5

## Other copper
VCC (plane layer: these items are gaps in the copper):
  lines w20: 850,300 850,1485 1015,1485 1015,480 1215,480 1305,480 1305,1570 1485,1570 1485,505 1705,505 1705,1593.58 1900,1593.58 1900,500 2090,500 2090,1430 2250,1430 2250,125 1247.61,125 1247.61,35 1065,35 1065,300 850,300

## Silkscreen, mask and mechanical layers (free items; w line width, h text height)
Mechanical 1:
  circle w0.5: c2277.91,1731.35 r45.28
  circle w0.5: c703.11,1731.35 r45.28
  lines w15: 2.32,1652.61 ccw(c81.06,1652.61) 81.06,1573.87 592.87,1573.87 592.87,77.81 ccw(c671.61,77.81) 671.61,-0.93 2309.41,-0.93 ccw(c2309.41,77.81) 2388.15,77.81 2388.15,1573.87 3022.01,1573.87 ccw(c3022.01,1652.61) 3100.75,1652.61 3100.75,2140.8 ccw(c3022.01,2140.8) 3022.01,2219.54 81.06,2219.54 ccw(c81.06,2140.8) 2.32,2140.8 2.32,1652.61